# EAGLE board Lilypad_Arduino_USB-Panel-v12b (EAGLE 9.6.2)
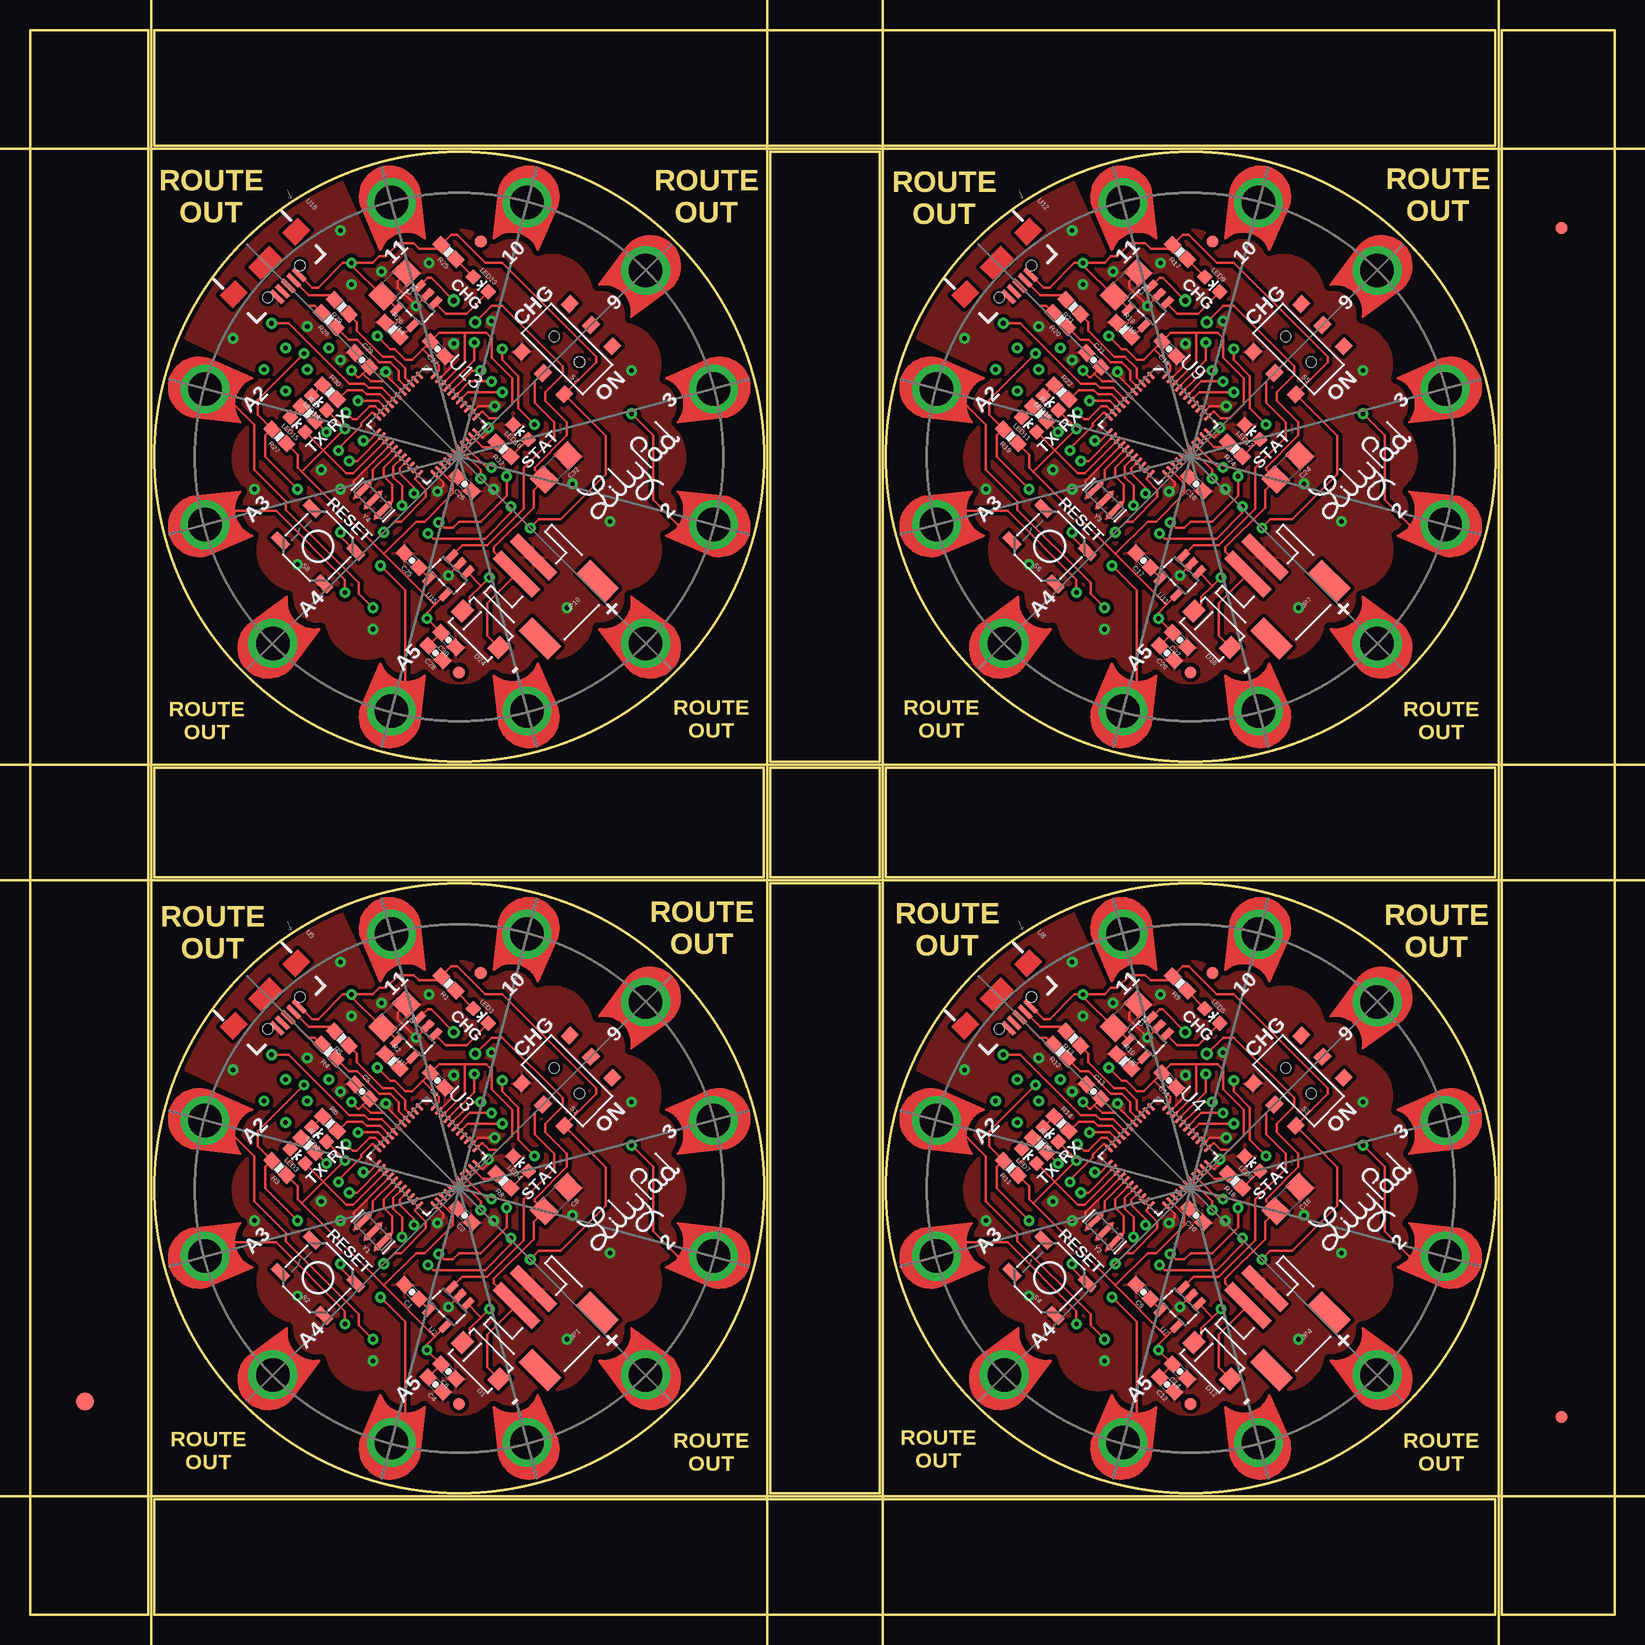
[diagram p0: board, top side]
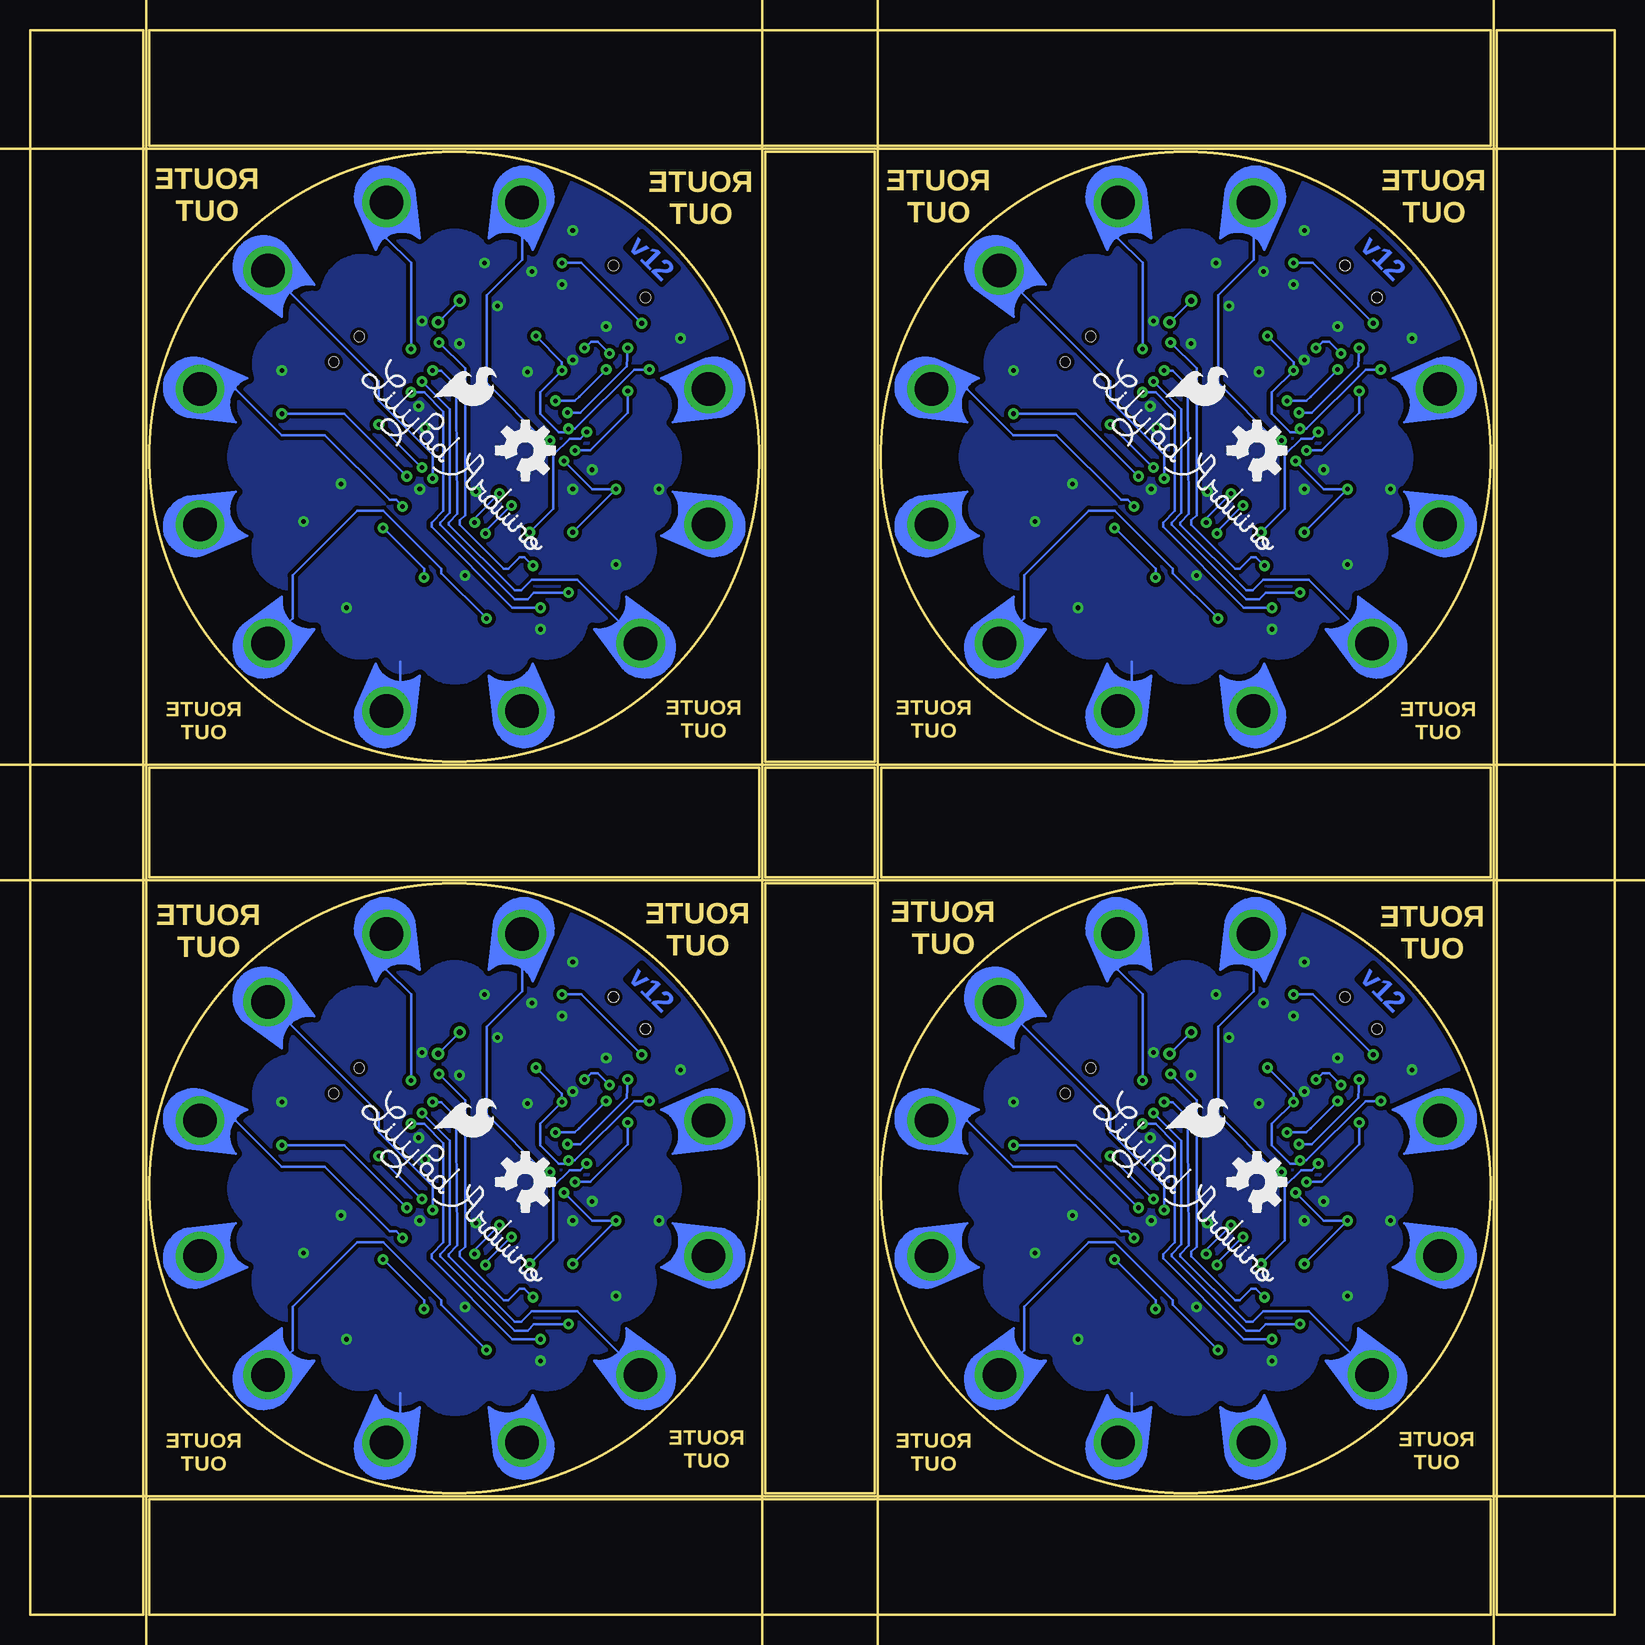
[diagram p1: board, bottom side, seen from below]

Size 132.08 x 132.08 mm. Coordinates in mm from the lower left corner, seen from the top.
Outline: 9.86,0 9.86,132.08 0,132.08 0,0 9.86,0
Outline: 10.36,0 122.12,0 122.12,9.65 10.36,9.65 10.36,0
Outline: 132.08,0 132.08,132.08 122.63,132.08 122.63,0 132.08,0
Outline: 122.12,132.08 10.36,132.08 10.36,122.43 122.12,122.43 122.12,132.08
Outline: 10.36,70.61 10.36,61.47 61.16,61.47 61.16,70.61 10.36,70.61
Outline: 71.32,70.61 71.32,61.47 122.12,61.47 122.12,70.61 71.32,70.61
Outline: 61.67,71.12 70.81,71.12 70.81,121.92 61.67,121.92 61.67,71.12
Outline: 61.67,10.16 70.81,10.16 70.81,60.96 61.67,60.96 61.67,10.16
Outline: 61.67,70.61 61.67,61.47 70.81,61.47 70.81,70.61 61.67,70.61
Outline: circle at 35.77,35.55 radius 25.4
Outline: circle at 96.73,35.55 radius 25.4
Outline: circle at 96.73,96.51 radius 25.4
Outline: circle at 35.77,96.51 radius 25.4
Copper layers (1*16): Top 0.035mm / dielectric 1.5mm / Bottom 0.035mm
Design rules "SparkFun-2-layer": minimum track width 7mil, minimum drill 15mil, track to track 8mil, track to pad 8mil, pad to pad 8mil, via to via 8mil, smd to smd 8mil, copper to edge 8mil, drill to drill 8mil, minimum pad ring 12mil, minimum via ring 10mil, stop-mask expansion 4mil, vias tented up to drill 20mil, thermal gap 10mil
tRestrict: area 10.7,26.1 to 18.6,32.7; area 52.9,38.4 to 60.9,45; area 15.7,15.6 to 24.2,24; area 47.4,47.1 to 55.8,55.5; area 52.9,26 to 60.9,32.6; area 38.7,52.7 to 45.4,60.6; area 26.2,10.5 to 32.9,18.4; area 10.7,38.5 to 18.6,45.1; area 26.3,52.7 to 32.9,60.6; area 38.6,10.5 to 45.2,18.4; area 12.3,20 to 21.5,29; area 10.3,32 to 17.6,39; 84 more areas
bRestrict: area 15.7,15.6 to 24.2,24; area 47.4,47.1 to 55.8,55.5; area 52.9,26 to 60.9,32.6; area 38.7,52.7 to 45.4,60.6; area 26.2,10.5 to 32.9,18.4; area 10.7,38.5 to 18.6,45.1; area 26.3,52.7 to 32.9,60.6; area 38.6,10.5 to 45.2,18.4; area 12.3,20 to 21.5,29; area 10.3,32 to 17.6,39; area 42.3,49.8 to 51.3,59; area 32.3,53.7 to 39.3,61; 72 more areas
Milling: 8 lines

## Footprints (pad centres in the part's own frame; a part is rotated, then mirrored left to right if it is on the bottom)
PETAL-LONG-1-2SIDE = drill 2.794 pad 4.064: 1 0.03,0
0603-CAP = smd 1.1 x 1: 1 -0.85,0; 2 0.85,0
1206 = smd 1.6 x 1.8: 1 -1.4,0; 2 1.4,0
SMA-DIODE = smd 1.27 x 1.47: A -2.15,0; C 2.15,0
FIDUCIAL-1.5X3 = smd 1.5 x 1.5: 1 0,0
FIDUCIAL-1X2 = smd 1 x 1: 1 0,0
JST-2-SMD = smd 1 x 4.6: 1 -1,-3.7; 2 1,-3.7 | smd 1.6 x 3.4: NC1 -3.4,1.5; NC2 3.4,1.5
LED-0603 = smd 1 x 1: A 0,-0.877; C 0,0.877
0603-RES = smd 1.1 x 1: 1 -0.85,0; 2 0.85,0
AYZ0202 = smd 1 x 1.15: 1 -2.5,2.825; 2 0,2.825; 3 2.5,2.825; 4 -2.5,-2.825; 5 0,-2.825; 6 2.5,-2.825 | hole 0.85: 1.5,0; -1.5,0
TACTILE_SWITCH_SMD = smd 1.524 x 0.762: 1 -2.54,1.905; 2 2.54,1.905; 3 -2.54,-1.905; 4 2.54,-1.905
SOT23-5 = smd 0.55 x 1.2: 1 -0.95,-1.3; 2 0,-1.3; 3 0.95,-1.3; 4 0.95,1.3; 5 -0.95,1.3
QFN-44-NOPAD_1:1-LESS_PASTE = smd 0.8 x 0.3: 1 -3.337,2.458; 2 -3.337,1.958; 3 -3.337,1.479; 4 -3.337,0.979; 5 -3.337,0.5; 6 -3.337,0; 7 -3.337,-0.5; 8 -3.337,-0.979; 9 -3.337,-1.479; 10 -3.337,-1.958; 11 -3.337,-2.458; 23 3.337,-2.458; 24 3.337,-1.958; 25 3.337,-1.479; 26 3.337,-0.979; 27 3.337,-0.5; 28 3.337,0; 29 3.337,0.5; 30 3.337,0.979; 31 3.337,1.479; 32 3.337,1.958; 33 3.337,2.458 | smd 0.3 x 0.8: 12 -2.458,-3.337; 13 -1.958,-3.337; 14 -1.479,-3.337; 15 -0.979,-3.337; 16 -0.5,-3.337; 17 0,-3.337; 18 0.5,-3.337; 19 0.979,-3.337; 20 1.479,-3.337; 21 1.958,-3.337; 22 2.458,-3.337; 34 2.458,3.337; 35 1.958,3.337; 36 1.479,3.337; 37 0.979,3.337; 38 0.5,3.337; 39 0,3.337; 40 -0.5,3.337; 41 -0.979,3.337; 42 -1.479,3.337; 43 -1.958,3.337; 44 -2.458,3.337
USB-AB-MICRO-SMD_V03 = smd 1.4 x 0.4: D+1 2.7,0; D-1 2.7,0.65; GND1 2.7,-1.3; ID1 2.7,-0.65; VBUS1 2.7,1.3 | hole 0.85: 2.2,1.9; 2.2,-1.9
RESONATOR-SMD = smd 0.45 x 1.905: 1 -1.2,0; 2 0,0; 3 1.2,0

## Placement (x,y rotation side)
+  SEWTAP9  [PETAL-LONG-1-2SIDE]  51.32,19.99 135 top
+1  SEWTAP9  [PETAL-LONG-1-2SIDE]  112.28,19.99 135 top
+2  SEWTAP9  [PETAL-LONG-1-2SIDE]  112.28,80.95 135 top
+3  SEWTAP9  [PETAL-LONG-1-2SIDE]  51.32,80.95 135 top
-  SEWTAP9  [PETAL-LONG-1-2SIDE]  41.42,14.34 105 top
-1  SEWTAP9  [PETAL-LONG-1-2SIDE]  102.38,14.34 105 top
-2  SEWTAP9  [PETAL-LONG-1-2SIDE]  102.38,75.3 105 top
-3  SEWTAP9  [PETAL-LONG-1-2SIDE]  41.42,75.3 105 top
A1  SEWTAP9  [PETAL-LONG-1-2SIDE]  75.51,41.21 345 top
A2  SEWTAP9  [PETAL-LONG-1-2SIDE]  14.55,41.21 345 top
A3  SEWTAP9  [PETAL-LONG-1-2SIDE]  14.55,29.89 15 top
A4  SEWTAP9  [PETAL-LONG-1-2SIDE]  20.21,19.99 45 top
A5  SEWTAP9  [PETAL-LONG-1-2SIDE]  30.11,14.34 75 top
A6  SEWTAP9  [PETAL-LONG-1-2SIDE]  75.51,29.89 15 top
A7  SEWTAP9  [PETAL-LONG-1-2SIDE]  91.07,14.34 75 top
A8  SEWTAP9  [PETAL-LONG-1-2SIDE]  81.17,19.99 45 top
A9  SEWTAP9  [PETAL-LONG-1-2SIDE]  75.51,102.17 345 top
A10  SEWTAP9  [PETAL-LONG-1-2SIDE]  75.51,90.85 15 top
A11  SEWTAP9  [PETAL-LONG-1-2SIDE]  91.07,75.3 75 top
A12  SEWTAP9  [PETAL-LONG-1-2SIDE]  81.17,80.95 45 top
A13  SEWTAP9  [PETAL-LONG-1-2SIDE]  14.55,102.17 345 top
A14  SEWTAP9  [PETAL-LONG-1-2SIDE]  14.55,90.85 15 top
A15  SEWTAP9  [PETAL-LONG-1-2SIDE]  30.11,75.3 75 top
A16  SEWTAP9  [PETAL-LONG-1-2SIDE]  20.21,80.95 45 top
C1  470pF  [0603-CAP]  31.82,26.93 135 top
C2  .1uF  [0603-CAP]  36.22,33.3 135 top
C3  .1uF  [0603-CAP]  33.97,44.53 135 top
C4  .1uF  [0603-CAP]  33.79,19.2 135 top
C5  1uF  [0603-CAP]  27.68,43.63 315 top
C6  4.7uF  [0603-CAP]  34.87,20.28 135 top
C7  4.7uF  [1206]  30.38,49.92 225 top
C8  4.7uF  [1206]  43.85,34.65 225 top
C9  470pF  [0603-CAP]  92.78,26.93 135 top
C10  .1uF  [0603-CAP]  97.18,33.3 135 top
C11  .1uF  [0603-CAP]  94.93,44.53 135 top
C12  .1uF  [0603-CAP]  94.75,19.2 135 top
C13  1uF  [0603-CAP]  88.64,43.63 315 top
C14  4.7uF  [0603-CAP]  95.83,20.28 135 top
C15  4.7uF  [1206]  91.34,49.92 225 top
C16  4.7uF  [1206]  104.81,34.65 225 top
C17  470pF  [0603-CAP]  92.78,87.89 135 top
C18  .1uF  [0603-CAP]  97.18,94.26 135 top
C19  .1uF  [0603-CAP]  94.93,105.49 135 top
C20  .1uF  [0603-CAP]  94.75,80.16 135 top
C21  1uF  [0603-CAP]  88.64,104.59 315 top
C22  4.7uF  [0603-CAP]  95.83,81.24 135 top
C23  4.7uF  [1206]  91.34,110.88 225 top
C24  4.7uF  [1206]  104.81,95.61 225 top
C25  470pF  [0603-CAP]  31.82,87.89 135 top
C26  .1uF  [0603-CAP]  36.22,94.26 135 top
C27  .1uF  [0603-CAP]  33.97,105.49 135 top
C28  .1uF  [0603-CAP]  33.79,80.16 135 top
C29  1uF  [0603-CAP]  27.68,104.59 315 top
C30  4.7uF  [0603-CAP]  34.87,81.24 135 top
C31  4.7uF  [1206]  30.38,110.88 225 top
C32  4.7uF  [1206]  43.85,95.61 225 top
D1  B340A  [SMA-DIODE]  37.56,21.18 135 top
D2  SEWTAP9  [PETAL-LONG-1-2SIDE]  117.94,29.89 165 top
D3  SEWTAP9  [PETAL-LONG-1-2SIDE]  112.28,51.11 225 top
D4  SEWTAP9  [PETAL-LONG-1-2SIDE]  117.94,41.21 195 top
D5  SEWTAP9  [PETAL-LONG-1-2SIDE]  56.98,29.89 165 top
D6  SEWTAP9  [PETAL-LONG-1-2SIDE]  56.98,41.21 195 top
D7  SEWTAP9  [PETAL-LONG-1-2SIDE]  102.38,56.76 255 top
D8  SEWTAP9  [PETAL-LONG-1-2SIDE]  91.07,56.76 285 top
D9  SEWTAP9  [PETAL-LONG-1-2SIDE]  51.32,51.11 225 top
D10  SEWTAP9  [PETAL-LONG-1-2SIDE]  41.42,56.76 255 top
D11  SEWTAP9  [PETAL-LONG-1-2SIDE]  30.11,56.76 285 top
D12  B340A  [SMA-DIODE]  98.52,21.18 135 top
D13  SEWTAP9  [PETAL-LONG-1-2SIDE]  117.94,90.85 165 top
D14  SEWTAP9  [PETAL-LONG-1-2SIDE]  112.28,112.07 225 top
D15  SEWTAP9  [PETAL-LONG-1-2SIDE]  117.94,102.17 195 top
D16  SEWTAP9  [PETAL-LONG-1-2SIDE]  102.38,117.72 255 top
D17  SEWTAP9  [PETAL-LONG-1-2SIDE]  91.07,117.72 285 top
D18  B340A  [SMA-DIODE]  98.52,82.14 135 top
D19  SEWTAP9  [PETAL-LONG-1-2SIDE]  56.98,90.85 165 top
D20  SEWTAP9  [PETAL-LONG-1-2SIDE]  51.32,112.07 225 top
D21  SEWTAP9  [PETAL-LONG-1-2SIDE]  56.98,102.17 195 top
D22  SEWTAP9  [PETAL-LONG-1-2SIDE]  41.42,117.72 255 top
D23  SEWTAP9  [PETAL-LONG-1-2SIDE]  30.11,117.72 285 top
D24  B340A  [SMA-DIODE]  37.56,82.14 135 top
E$1  [FIDUCIAL-1.5X3]  4.57,17.78 0 top
E$3  [FIDUCIAL-1X2]  127.64,16.51 0 top
E$5  [FIDUCIAL-1X2]  127.64,115.57 180 top
JP1  JST-2  [JST-2-SMD]  43.85,23.87 225 top
JP2  FIDUCIAL1X2  [FIDUCIAL-1X2]  35.77,17.59 45 top
JP3  FIDUCIAL1X2  [FIDUCIAL-1X2]  37.56,53.51 45 top
JP4  JST-2  [JST-2-SMD]  104.81,23.87 225 top
JP5  FIDUCIAL1X2  [FIDUCIAL-1X2]  96.73,17.59 45 top
JP6  FIDUCIAL1X2  [FIDUCIAL-1X2]  98.52,53.51 45 top
JP7  JST-2  [JST-2-SMD]  104.81,84.83 225 top
JP8  FIDUCIAL1X2  [FIDUCIAL-1X2]  96.73,78.55 45 top
JP9  FIDUCIAL1X2  [FIDUCIAL-1X2]  98.52,114.47 45 top
JP10  JST-2  [JST-2-SMD]  43.85,84.83 225 top
JP11  FIDUCIAL1X2  [FIDUCIAL-1X2]  35.77,78.55 45 top
JP12  FIDUCIAL1X2  [FIDUCIAL-1X2]  37.56,114.47 45 top
LED1  RED  [LED-0603]  37.56,49.92 225 top
LED2  RED  [LED-0603]  24.09,40.04 45 top
LED3  RED  [LED-0603]  22.3,38.24 45 top
LED4  RED  [LED-0603]  40.89,37.61 45 top
LED5  RED  [LED-0603]  98.52,49.92 225 top
LED6  RED  [LED-0603]  85.05,40.04 45 top
LED7  RED  [LED-0603]  83.26,38.24 45 top
LED8  RED  [LED-0603]  101.85,37.61 45 top
LED9  RED  [LED-0603]  98.52,110.88 225 top
LED10  RED  [LED-0603]  85.05,101 45 top
LED11  RED  [LED-0603]  83.26,99.2 45 top
LED12  RED  [LED-0603]  101.85,98.57 45 top
LED13  RED  [LED-0603]  37.56,110.88 225 top
LED14  RED  [LED-0603]  24.09,101 45 top
LED15  RED  [LED-0603]  22.3,99.2 45 top
LED16  RED  [LED-0603]  40.89,98.57 45 top
R1  330  [0603-RES]  34.87,52.61 135 top
R2  10k  [0603-RES]  30.2,46.15 315 top
R3  10k  [0603-RES]  20.77,37.26 135 top
R4  22  [0603-RES]  24.9,46.95 135 top
R5  22  [0603-RES]  25.98,48.03 135 top
R6  330  [0603-RES]  24.99,40.94 315 top
R7  330  [0603-RES]  23.19,39.14 315 top
R8  330  [0603-RES]  39.45,36.18 135 top
R9  330  [0603-RES]  95.83,52.61 135 top
R10  10k  [0603-RES]  91.16,46.15 315 top
R11  10k  [0603-RES]  81.73,37.26 135 top
R12  22  [0603-RES]  85.86,46.95 135 top
R13  22  [0603-RES]  86.94,48.03 135 top
R14  330  [0603-RES]  85.95,40.94 315 top
R15  330  [0603-RES]  84.15,39.14 315 top
R16  330  [0603-RES]  100.41,36.18 135 top
R17  330  [0603-RES]  95.83,113.57 135 top
R18  10k  [0603-RES]  91.16,107.11 315 top
R19  10k  [0603-RES]  81.73,98.22 135 top
R20  22  [0603-RES]  85.86,107.91 135 top
R21  22  [0603-RES]  86.94,108.99 135 top
R22  330  [0603-RES]  85.95,101.9 315 top
R23  330  [0603-RES]  84.15,100.1 315 top
R24  330  [0603-RES]  100.41,97.14 135 top
R25  330  [0603-RES]  34.87,113.57 135 top
R26  10k  [0603-RES]  30.2,107.11 315 top
R27  10k  [0603-RES]  20.77,98.22 135 top
R28  22  [0603-RES]  24.9,107.91 135 top
R29  22  [0603-RES]  25.98,108.99 135 top
R30  330  [0603-RES]  24.99,101.9 315 top
R31  330  [0603-RES]  23.19,100.1 315 top
R32  330  [0603-RES]  39.45,97.14 135 top
S1  [AYZ0202]  44.75,44.53 135 top
S2  !RESET  [TACTILE_SWITCH_SMD]  24,28.1 135 top
S3  [AYZ0202]  105.71,44.53 135 top
S4  !RESET  [TACTILE_SWITCH_SMD]  84.96,28.1 135 top
S5  [AYZ0202]  105.71,105.49 135 top
S6  !RESET  [TACTILE_SWITCH_SMD]  84.96,89.06 135 top
S7  [AYZ0202]  44.75,105.49 135 top
S8  !RESET  [TACTILE_SWITCH_SMD]  24,89.06 135 top
U1  MCP73831  [SOT23-5]  32.17,48.12 135 top
U2  MIC5219  [SOT23-5]  34.87,25.67 135 top
U3  ATMEGA32U41:1-LESS_PASTE  [QFN-44-NOPAD_1:1-LESS_PASTE]  33.07,38.24 315 top
U4  ATMEGA32U41:1-LESS_PASTE  [QFN-44-NOPAD_1:1-LESS_PASTE]  94.03,38.24 315 top
U5  [USB-AB-MICRO-SMD_V03]  19.6,51.71 315 top
U6  MCP73831  [SOT23-5]  93.13,48.12 135 top
U7  MIC5219  [SOT23-5]  95.83,25.67 135 top
U8  [USB-AB-MICRO-SMD_V03]  80.56,51.71 315 top
U9  ATMEGA32U41:1-LESS_PASTE  [QFN-44-NOPAD_1:1-LESS_PASTE]  94.03,99.2 315 top
U10  MCP73831  [SOT23-5]  93.13,109.08 135 top
U11  MIC5219  [SOT23-5]  95.83,86.63 135 top
U12  [USB-AB-MICRO-SMD_V03]  80.56,112.67 315 top
U13  ATMEGA32U41:1-LESS_PASTE  [QFN-44-NOPAD_1:1-LESS_PASTE]  33.07,99.2 315 top
U14  MCP73831  [SOT23-5]  32.17,109.08 135 top
U15  MIC5219  [SOT23-5]  34.87,86.63 135 top
U16  [USB-AB-MICRO-SMD_V03]  19.6,112.67 315 top
U$1  LOGO-LPLPA  [LOGO-LPA]  35.77,35.55 315 bottom
U$2  LOGO-LPLP  [LOGO-LILYPAD]  111.01,34.38 45 top
U$3  LOGO-LPLPA  [LOGO-LPA]  96.73,35.55 315 bottom
U$4  OSHW-LOGOM  [OSHW-LOGO-M]  90.8,36.09 315 bottom
U$5  OSHW-LOGOM  [OSHW-LOGO-M]  29.84,36.09 315 bottom
U$6  [SFE_LOGO_FLAME_.2]  98.88,40.58 315 bottom
U$7  [SFE_LOGO_FLAME_.2]  37.92,40.58 315 bottom
U$8  LOGO-LPLP  [LOGO-LILYPAD]  111.01,95.34 45 top
U$9  LOGO-LPLPA  [LOGO-LPA]  96.73,96.51 315 bottom
U$10  OSHW-LOGOM  [OSHW-LOGO-M]  90.8,97.05 315 bottom
U$11  [SFE_LOGO_FLAME_.2]  98.88,101.54 315 bottom
U$12  LOGO-LPLP  [LOGO-LILYPAD]  50.05,95.34 45 top
U$13  LOGO-LPLP  [LOGO-LILYPAD]  50.05,34.38 45 top
U$14  LOGO-LPLPA  [LOGO-LPA]  35.77,96.51 315 bottom
U$15  OSHW-LOGOM  [OSHW-LOGO-M]  29.84,97.05 315 bottom
U$16  [SFE_LOGO_FLAME_.2]  37.92,101.54 315 bottom
Y1  8MHz  [RESONATOR-SMD]  28.58,31.96 135 top
Y2  8MHz  [RESONATOR-SMD]  89.54,31.96 135 top
Y3  8MHz  [RESONATOR-SMD]  89.54,92.92 135 top
Y4  8MHz  [RESONATOR-SMD]  28.58,92.92 135 top

## Library data of the parts
+ +1-+3 - -1--3 A1-A16 D2-D11 D13-D17 D19-D23 U$2 U$8 U$12 U$13 = LilyPad-Wearables; NO_PART: 1
C1 C9 C17 C25 = SparkFun-Passives; PROD_ID: CAP-07884
C2-C4 C10-C12 C18-C20 C26-C28 = SparkFun-Passives; PROD_ID: CAP-00810
C5 C13 C21 C29 = SparkFun-Passives; PROD_ID: CAP-00868
C6 C14 C22 C30 = SparkFun-Passives; PROD_ID: CAP-08280
C7 C8 C15 C16 C23 C24 C31 C32 = SparkFun-Passives; PROD_ID: CAP-10300
D1 D12 D18 D24 = SparkFun-DiscreteSemi; PROD_ID: DIO-09886
E$1 = SparkFun-Retired
E$3 E$5 U$6 U$7 U$11 U$16 = SparkFun-Aesthetics
JP1 JP4 JP7 JP10 = SparkFun-Connectors; PROD_ID: CONN-08352
JP2 JP3 JP5 JP6 JP8 JP9 JP11 JP12 U$4 U$5 U$10 U$15 = SparkFun
LED1-LED16 = SparkFun-LED; PROD_ID: DIO-00819
R1 R7-R9 R15-R17 R23-R25 R31 R32 = SparkFun-Passives; PROD_ID: RES-00818
R2 R3 R10 R11 R18 R19 R26 R27 = SparkFun-Resistors; PROD_ID: RES-00824
R4 R5 R12 R13 R20 R21 R28 R29 = SparkFun-Resistors; PROD_ID: RES-08698
R6 R14 R22 R30 = SparkFun-Resistors; PROD_ID: RES-00818
S1 S3 S5 S7 = SparkFun-Electromechanical; PROD_ID: SWCH-08179; VALUE: DPDT
S2 S4 S6 S8 = SparkFun-Electromechanical; PROD_ID: SWCH-08247
U1 U6 U10 U14 = SparkFun-PowerIC; PROD_ID: IC-09995
U2 U7 U11 U15 = SparkFun-PowerIC; PROD_ID: VREG-09872; VALUE: MIC5219 3.3V
U3 U4 U9 U13 = Testing; PROD_ID: IC-10828
U5 U8 U12 U16 = SparkFun-Connectors; PROD_ID: CONN-11794
U$1 U$3 U$9 U$14 = LilyPad-Wearables
Y1-Y4 = SparkFun-FreqCtrl; PROD_ID: XTAL-08895; VALUE: 8MHZ

## Nets
3.3V: +.1 C2.2 C3.2 C4.2 C5.2 C6.2 LED2.A LED3.A R3.1 U2.5 U3.6 U3.14 U3.24 U3.34 U3.42 U3.44
3.3V1: +1.1 C10.2 C11.2 C12.2 C13.2 C14.2 LED6.A LED7.A R11.1 U4.6 U4.14 U4.24 U4.34 U4.42 U4.44 U7.5
3.3V2: +2.1 C18.2 C19.2 C20.2 C21.2 C22.2 LED10.A LED11.A R19.1 U9.6 U9.14 U9.24 U9.34 U9.42 U9.44 U11.5
3.3V3: +3.1 C26.2 C27.2 C28.2 C29.2 C30.2 LED14.A LED15.A R27.1 U13.6 U13.14 U13.24 U13.34 U13.42 U13.44 U15.5
5V: C7.2 D1.C R1.2 S1.1 U1.4 U2.1 U3.7 U5.VBUS1
5V1: C15.2 D12.C R9.2 S3.1 U4.7 U6.4 U7.1 U8.VBUS1
5V2: C23.2 D18.C R17.2 S5.1 U9.7 U10.4 U11.1 U12.VBUS1
5V3: C31.2 D24.C R25.2 S7.1 U13.7 U14.4 U15.1 U16.VBUS1
D+: R4.1 U3.4
D+1: R12.1 U4.4
D+2: R20.1 U9.4
D+3: R28.1 U13.4
D-: R5.1 U3.3
D-1: R13.1 U4.3
D-2: R21.1 U9.3
D-3: R29.1 U13.3
GND: -.1 C1.2 C2.1 C3.1 C4.1 C5.1 C6.1 C7.1 C8.1 JP1.1 LED4.C R2.1 S1.3 S2.1 U1.2 U2.2 U3.5 U3.15 U3.23 U3.33 U3.35 U3.43 U5.GND1 Y1.2
GND1: -1.1 C9.2 C10.1 C11.1 C12.1 C13.1 C14.1 C15.1 C16.1 JP4.1 LED8.C R10.1 S3.3 S4.1 U4.5 U4.15 U4.23 U4.33 U4.35 U4.43 U6.2 U7.2 U8.GND1 Y2.2
GND2: -2.1 C17.2 C18.1 C19.1 C20.1 C21.1 C22.1 C23.1 C24.1 JP7.1 LED12.C R18.1 S5.3 S6.1 U9.5 U9.15 U9.23 U9.33 U9.35 U9.43 U10.2 U11.2 U12.GND1 Y3.2
GND3: -3.1 C25.2 C26.1 C27.1 C28.1 C29.1 C30.1 C31.1 C32.1 JP10.1 LED16.C R26.1 S7.3 S8.1 U13.5 U13.15 U13.23 U13.33 U13.35 U13.43 U14.2 U15.2 U16.GND1 Y4.2
MISO: U3.11
MISO1: U4.11
MISO2: U9.11
MISO3: U13.11
MOSI: U3.10
MOSI1: U4.10
MOSI2: U9.10
MOSI3: U13.10
N$1: LED2.C R6.1
N$2: S1.2 U2.3
N$3: LED1.A R1.1
N$4: LED1.C U1.1
N$5: U3.17 Y1.1
N$6: R2.2 U1.5
N$7: U3.16 Y1.3
N$8: C1.1 U2.4
N$9: D11.1 U3.12
N$10: D10.1 U3.30
N$11: D9.1 U3.29
N$12: D5.1 U3.19
N$13: D6.1 U3.18
N$14: A5.1 U3.41
N$15: A4.1 U3.40
N$16: A3.1 U3.39
N$17: A2.1 U3.38
N$18: LED4.A R8.1
N$19: R5.2 U5.D-1
N$20: R4.2 U5.D+1
N$21: LED3.C R7.1
N$22: S3.2 U7.3
N$23: LED5.A R9.1
N$24: LED5.C U6.1
N$25: R10.2 U6.5
N$26: C9.1 U7.4
N$27: D8.1 U4.12
N$28: D7.1 U4.30
N$29: D3.1 U4.29
N$30: A7.1 U4.41
N$31: A8.1 U4.40
N$32: A6.1 U4.39
N$33: A1.1 U4.38
N$34: R13.2 U8.D-1
N$35: R12.2 U8.D+1
N$36: LED6.C R14.1
N$37: LED7.C R15.1
N$38: U4.17 Y2.1
N$39: U4.16 Y2.3
N$40: D2.1 U4.19
N$41: D4.1 U4.18
N$42: LED8.A R16.1
N$43: S5.2 U11.3
N$44: LED9.A R17.1
N$45: LED9.C U10.1
N$46: R18.2 U10.5
N$47: C17.1 U11.4
N$48: D17.1 U9.12
N$49: D16.1 U9.30
N$50: D14.1 U9.29
N$51: A11.1 U9.41
N$52: A12.1 U9.40
N$53: A10.1 U9.39
N$54: A9.1 U9.38
N$55: R21.2 U12.D-1
N$56: R20.2 U12.D+1
N$57: LED10.C R22.1
N$58: LED11.C R23.1
N$59: U9.17 Y3.1
N$60: U9.16 Y3.3
N$61: D13.1 U9.19
N$62: D15.1 U9.18
N$63: LED12.A R24.1
N$64: S7.2 U15.3
N$65: LED13.A R25.1
N$66: LED13.C U14.1
N$67: R26.2 U14.5
N$68: C25.1 U15.4
N$69: D23.1 U13.12
N$70: D22.1 U13.30
N$71: D20.1 U13.29
N$72: A15.1 U13.41
N$73: A16.1 U13.40
N$74: A14.1 U13.39
N$75: A13.1 U13.38
N$76: R29.2 U16.D-1
N$77: R28.2 U16.D+1
N$78: LED14.C R30.1
N$79: LED15.C R31.1
N$80: U13.17 Y4.1
N$81: U13.16 Y4.3
N$82: D19.1 U13.19
N$83: D21.1 U13.18
N$84: LED16.A R32.1
RESET: R3.2 S2.3 U3.13
RESET1: R11.2 S4.3 U4.13
RESET2: R19.2 S6.3 U9.13
RESET3: R27.2 S8.3 U13.13
RX_LED: R6.2 U3.8
RX_LED1: R14.2 U4.8
RX_LED2: R22.2 U9.8
RX_LED3: R30.2 U13.8
SCK: U3.9
SCK1: U4.9
SCK2: U9.9
SCK3: U13.9
TX_LED: R7.2 U3.22
TX_LED1: R15.2 U4.22
TX_LED2: R23.2 U9.22
TX_LED3: R31.2 U13.22
USER_LED: R8.2 U3.32
USER_LED1: R16.2 U4.32
USER_LED2: R24.2 U9.32
USER_LED3: R32.2 U13.32
V_BATT: C8.2 D1.A JP1.2 U1.3
V_BATT1: C16.2 D12.A JP4.2 U6.3
V_BATT2: C24.2 D18.A JP7.2 U10.3
V_BATT3: C32.2 D24.A JP10.2 U14.3

## Tracks (layer width: path | path; a pad name or v marks a point on that pad's centre or on a via)
3.3V  (via drill 0.38)
  Top 0.203: 34.42,23.88 U2.5 33.79,23.25 | LED2.A 25.8,38.33 v26.25,37.88 24.45,36.09 | 33.79,23.25 33.7,23.25 29.48,27.47 | 33.79,23.25 33.07,22.53 v33.07,22.08 C6.2 C4.2 | R3.1 22.3,35.73 22.3,34.65 22.66,34.29 | 32.74,44.5 C3.2 34.12,45.88 36.22,45.88 | U3.44 34.06,42.71 34.06,43.18 32.74,44.5 | 29.48,27.47 32.17,30.16 32.89,30.16 35.23,32.5 35.23,33.32 35.13,33.42 | U3.24 35.13,33.42 | C2.2 35.13,33.42 | 27.75,42.49 27.45,42.19 27.33,42.19 v26.79,42.73 | U3.6 29.48,41.84 28.4,41.84 27.75,42.49 | 27.75,42.49 C5.2 | v28.94,45.61 30.02,44.53 30.38,44.53 31.28,43.63 31.87,43.63 32.74,44.5 | U3.34 37.63,39.32 37.74,39.32 38.28,38.78 39,38.78 40.17,39.95 40.17,42.1 38.46,43.81 38.46,45.43 38.01,45.88 36.22,45.88 | U3.42 36.22,43.48 36.22,45.88 | U3.14 26.94,34.2 26.34,34.2 24.45,36.09 | 22.66,34.29 24.45,36.09 | 24.45,36.09 | 24.45,36.09 | LED3.A 24.45,36.09 | 24.45,36.09 | 22.66,34.29 | 22.66,34.29 29.48,27.47
  Bottom 0.203: v19.51,42.82 20.77,42.82 25.71,37.88 v26.25,37.88 | v33.07,22.08 36.84,25.85 36.84,26.21 41.69,31.06 43.85,31.06 49.24,25.67 49.24,22.08 +.1 | v26.25,37.88 | v26.25,37.88 26.52,37.62 27.06,37.62 28.58,39.14 28.58,40.94 v26.79,42.73 26.79,43.45 v28.94,45.61
3.3V1  (via drill 0.38)
  Top 0.203: 95.38,23.88 U7.5 94.75,23.25 | LED6.A 86.76,38.33 v87.21,37.88 85.41,36.09 | 94.75,23.25 94.66,23.25 90.44,27.47 | 94.75,23.25 94.03,22.53 v94.03,22.08 C14.2 C12.2 | R11.1 83.26,35.73 83.26,34.65 83.62,34.29 | 93.7,44.5 C11.2 95.08,45.88 97.18,45.88 | U4.44 95.02,42.71 95.02,43.18 93.7,44.5 | 90.44,27.47 93.14,30.16 93.85,30.16 96.19,32.5 96.19,33.32 96.09,33.42 | U4.24 96.09,33.42 | C10.2 96.09,33.42 | 88.71,42.49 88.41,42.19 88.29,42.19 v87.75,42.73 | U4.6 90.44,41.84 89.36,41.84 88.71,42.49 | 88.71,42.49 C13.2 | v89.9,45.61 90.98,44.53 91.34,44.53 92.24,43.63 92.83,43.63 93.7,44.5 | U4.34 98.59,39.32 98.7,39.32 99.24,38.78 99.96,38.78 101.13,39.95 101.13,42.1 99.42,43.81 99.42,45.43 98.97,45.88 97.18,45.88 | U4.42 97.18,43.48 97.18,45.88 | U4.14 87.9,34.2 87.3,34.2 85.41,36.09 | 83.62,34.29 85.41,36.09 | 85.41,36.09 | 85.41,36.09 | LED7.A 85.41,36.09 | 85.41,36.09 | 83.62,34.29 | 83.62,34.29 90.44,27.47
  Bottom 0.203: v80.47,42.82 81.73,42.82 86.67,37.88 v87.21,37.88 | v94.03,22.08 97.81,25.85 97.81,26.21 102.65,31.06 104.81,31.06 110.2,25.67 110.2,22.08 +1.1 | v87.21,37.88 | v87.21,37.88 87.48,37.62 88.02,37.62 89.54,39.14 89.54,40.94 v87.75,42.73 87.75,43.45 v89.9,45.61
3.3V2  (via drill 0.38)
  Top 0.203: 95.38,84.83 U11.5 94.75,84.21 | LED10.A 86.76,99.29 v87.21,98.84 85.41,97.05 | 94.75,84.21 94.66,84.21 90.44,88.43 | 94.75,84.21 94.03,83.49 v94.03,83.04 C22.2 C20.2 | R19.1 83.26,96.69 83.26,95.61 83.62,95.25 | 93.7,105.46 C19.2 95.08,106.84 97.18,106.84 | U9.44 95.02,103.67 95.02,104.14 93.7,105.46 | 90.44,88.43 93.14,91.12 93.85,91.12 96.19,93.46 96.19,94.28 96.09,94.38 | U9.24 96.09,94.38 | C18.2 96.09,94.38 | 88.71,103.45 88.41,103.15 88.29,103.15 v87.75,103.69 | U9.6 90.44,102.8 89.36,102.8 88.71,103.45 | 88.71,103.45 C21.2 | v89.9,106.57 90.98,105.49 91.34,105.49 92.24,104.59 92.83,104.59 93.7,105.46 | U9.34 98.59,100.28 98.7,100.28 99.24,99.74 99.96,99.74 101.13,100.91 101.13,103.06 99.42,104.77 99.42,106.39 98.97,106.84 97.18,106.84 | U9.42 97.18,104.44 97.18,106.84 | U9.14 87.9,95.16 87.3,95.16 85.41,97.05 | 83.62,95.25 85.41,97.05 | 85.41,97.05 | 85.41,97.05 | LED11.A 85.41,97.05 | 85.41,97.05 | 83.62,95.25 | 83.62,95.25 90.44,88.43
  Bottom 0.203: v80.47,103.78 81.73,103.78 86.67,98.84 v87.21,98.84 | v94.03,83.04 97.81,86.81 97.81,87.17 102.65,92.02 104.81,92.02 110.2,86.63 110.2,83.04 +2.1 | v87.21,98.84 | v87.21,98.84 87.48,98.58 88.02,98.58 89.54,100.1 89.54,101.9 v87.75,103.69 87.75,104.41 v89.9,106.57
3.3V3  (via drill 0.38)
  Top 0.203: 34.42,84.83 U15.5 33.79,84.21 | LED14.A 25.8,99.29 v26.25,98.84 24.45,97.05 | 33.79,84.21 33.7,84.21 29.48,88.43 | 33.79,84.21 33.07,83.49 v33.07,83.04 C30.2 C28.2 | R27.1 22.3,96.69 22.3,95.61 22.66,95.25 | 32.74,105.46 C27.2 34.12,106.84 36.22,106.84 | U13.44 34.06,103.67 34.06,104.14 32.74,105.46 | 29.48,88.43 32.17,91.12 32.89,91.12 35.23,93.46 35.23,94.28 35.13,94.38 | U13.24 35.13,94.38 | C26.2 35.13,94.38 | 27.75,103.45 27.45,103.15 27.33,103.15 v26.79,103.69 | U13.6 29.48,102.8 28.4,102.8 27.75,103.45 | 27.75,103.45 C29.2 | v28.94,106.57 30.02,105.49 30.38,105.49 31.28,104.59 31.87,104.59 32.74,105.46 | U13.34 37.63,100.28 37.74,100.28 38.28,99.74 39,99.74 40.17,100.91 40.17,103.06 38.46,104.77 38.46,106.39 38.01,106.84 36.22,106.84 | U13.42 36.22,104.44 36.22,106.84 | U13.14 26.94,95.16 26.34,95.16 24.45,97.05 | 22.66,95.25 24.45,97.05 | 24.45,97.05 | 24.45,97.05 | LED15.A 24.45,97.05 | 24.45,97.05 | 22.66,95.25 | 22.66,95.25 29.48,88.43
  Bottom 0.203: v19.51,103.78 20.77,103.78 25.71,98.84 v26.25,98.84 | v33.07,83.04 36.84,86.81 36.84,87.17 41.69,92.02 43.85,92.02 49.24,86.63 49.24,83.04 +3.1 | v26.25,98.84 | v26.25,98.84 26.52,98.58 27.06,98.58 28.58,100.1 28.58,101.9 v26.79,103.69 26.79,104.41 v28.94,106.57
5V  (via drill 0.38)
  Top 0.203: U3.7 29.31,41.3 28.22,41.3 27.86,41.66 26.61,41.66 21.58,46.69 v20.14,46.69 | v41.69,29.62 42.41,30.34 44.21,30.34 47.98,34.11 47.98,37.3 S1.1 47.17,43.42 47.17,43.9 39.36,51.71 37.92,51.71 35.59,54.05 35.1,54.05 R1.2 33.94,52.88 32.44,52.88 32,53.33 30.74,53.33 29.66,52.25 29.12,52.25 28.58,51.71 v26.79,51.71 | v26.79,51.71 26.07,51.71 24,49.65 23.51,49.65 U5.VBUS1 | v26.79,51.71 26.79,51.53 C7.2 29.53,48.93 U1.4 | 37.56,24.77 36.66,23.88 36.66,23.32 D1.C | 37.56,24.77 v38.28,25.49 | v38.28,25.49 | U2.1 37.56,24.82 37.56,24.77
  Bottom 0.203: v20.14,46.69 25.17,51.71 v26.79,51.71 | v41.69,29.62 38.28,26.21 v38.28,25.49
5V1  (via drill 0.38)
  Top 0.203: U4.7 90.27,41.3 89.18,41.3 88.82,41.66 87.57,41.66 82.54,46.69 v81.1,46.69 | v102.65,29.62 103.37,30.34 105.17,30.34 108.94,34.11 108.94,37.3 S3.1 108.13,43.42 108.13,43.9 100.32,51.71 98.88,51.71 96.55,54.05 96.06,54.05 R9.2 94.9,52.88 93.4,52.88 92.95,53.33 91.7,53.33 90.62,52.25 90.08,52.25 89.54,51.71 v87.75,51.71 | v87.75,51.71 87.03,51.71 84.96,49.65 84.47,49.65 U8.VBUS1 | v87.75,51.71 87.75,51.53 C15.2 90.49,48.93 U6.4 | 98.52,24.77 97.62,23.88 97.62,23.32 D12.C | 98.52,24.77 v99.24,25.49 | v99.24,25.49 | U7.1 98.52,24.82 98.52,24.77
  Bottom 0.203: v81.1,46.69 86.13,51.71 v87.75,51.71 | v102.65,29.62 99.24,26.21 v99.24,25.49
5V2  (via drill 0.38)
  Top 0.203: U9.7 90.27,102.26 89.18,102.26 88.82,102.62 87.57,102.62 82.54,107.64 v81.1,107.64 | v102.65,90.58 103.37,91.3 105.17,91.3 108.94,95.07 108.94,98.26 S5.1 108.13,104.38 108.13,104.86 100.32,112.67 98.88,112.67 96.55,115.01 96.06,115.01 R17.2 94.9,113.84 93.4,113.84 92.95,114.29 91.7,114.29 90.62,113.21 90.08,113.21 89.54,112.67 v87.75,112.67 | v87.75,112.67 87.03,112.67 84.96,110.61 84.47,110.61 U12.VBUS1 | v87.75,112.67 87.75,112.49 C23.2 90.49,109.89 U10.4 | 98.52,85.73 97.62,84.83 97.62,84.28 D18.C | 98.52,85.73 v99.24,86.45 | v99.24,86.45 | U11.1 98.52,85.78 98.52,85.73
  Bottom 0.203: v81.1,107.64 86.13,112.67 v87.75,112.67 | v102.65,90.58 99.24,87.17 v99.24,86.45
5V3  (via drill 0.38)
  Top 0.203: U13.7 29.31,102.26 28.22,102.26 27.86,102.62 26.61,102.62 21.58,107.64 v20.14,107.64 | v41.69,90.58 42.41,91.3 44.21,91.3 47.98,95.07 47.98,98.26 S7.1 47.17,104.38 47.17,104.86 39.36,112.67 37.92,112.67 35.59,115.01 35.1,115.01 R25.2 33.94,113.84 32.44,113.84 32,114.29 30.74,114.29 29.66,113.21 29.12,113.21 28.58,112.67 v26.79,112.67 | v26.79,112.67 26.07,112.67 24,110.61 23.51,110.61 U16.VBUS1 | v26.79,112.67 26.79,112.49 C31.2 29.53,109.89 U14.4 | 37.56,85.73 36.66,84.83 36.66,84.28 D24.C | 37.56,85.73 v38.28,86.45 | v38.28,86.45 | U15.1 37.56,85.78 37.56,85.73
  Bottom 0.203: v20.14,107.64 25.17,112.67 v26.79,112.67 | v41.69,90.58 38.28,87.17 v38.28,86.45
D+
  Top 0.203: R4.1 26.55,45.3 27.27,45.3 29.12,43.45 30.02,43.45 30.74,42.73 30.74,41.96 U3.4
D+1
  Top 0.203: R12.1 87.52,45.3 88.23,45.3 90.08,43.45 90.98,43.45 91.7,42.73 91.7,41.96 U4.4
D+2
  Top 0.203: R20.1 87.52,106.26 88.23,106.26 90.08,104.41 90.98,104.41 91.7,103.69 91.7,102.92 U9.4
D+3
  Top 0.203: R28.1 26.55,106.26 27.27,106.26 29.12,104.41 30.02,104.41 30.74,103.69 30.74,102.92 U13.4
D-
  Top 0.203: R5.1 27.24,46.77 27.24,46.06 29.39,43.9 30.29,43.9 31.28,42.91 31.28,42.13 U3.3
D-1
  Top 0.203: R13.1 88.2,46.77 88.2,46.06 90.35,43.9 91.25,43.9 92.24,42.91 92.24,42.13 U4.3
D-2
  Top 0.203: R21.1 88.2,107.73 88.2,107.02 90.35,104.86 91.25,104.86 92.24,103.87 92.24,103.09 U9.3
D-3
  Top 0.203: R29.1 27.24,107.73 27.24,107.02 29.39,104.86 30.29,104.86 31.28,103.87 31.28,103.09 U13.3
GND  (via drill 0.38)
  Top 0.203: U1.2 v32.17,48.12 30.65,49.65 30.65,50.19 C7.1 | U2.2 v34.87,25.67 | C3.1 35.14,43.36 35.14,43.08 U3.43 | U3.15 26.97,33.52 26.97,33.39 | U3.23 34.42,33.42 34.42,33.12 v33.97,32.67 | U3.5 29.65,42.37 v29.65,42.63 | U3.33 37.63,37.16 37.74,37.16 38.19,37.62 v38.19,37.97 | U3.35 37.37,39.77 v38.73,39.77
  Bottom 0.203: -.1 40.26,15.52 40.26,18.49
  other vias: 23.1,46.42 44.75,22.98 48.34,30.16 28.58,21.18 26.79,49.92 22.3,26.57 25.89,43.63 29.3,51 16.91,45.43 25.89,32.85 24.27,34.47 38.46,46.86 35.32,44.98 38.64,32.85 45.2,33.3 33.25,51.71 18.7,32.85 25.89,54.41 50.14,42.73
  pour Top (isolate 0.305): 53.73,53.51 arc90 17.81,53.51 arc90 17.81,17.59 arc90 53.73,17.59 arc90
  pour Bottom (isolate 0.305): 53.73,53.51 arc90 17.81,53.51 arc90 17.81,17.59 arc90 53.73,17.59 arc90
GND1  (via drill 0.38)
  Top 0.203: U6.2 v93.14,48.12 91.61,49.65 91.61,50.19 C15.1 | U7.2 v95.83,25.67 | C11.1 96.1,43.36 96.1,43.08 U4.43 | U4.15 87.93,33.52 87.93,33.39 | U4.23 95.38,33.42 95.38,33.12 v94.93,32.67 | U4.5 90.61,42.37 v90.61,42.63 | U4.33 98.59,37.16 98.7,37.16 99.15,37.62 v99.15,37.97 | U4.35 98.33,39.77 v99.69,39.77
  Bottom 0.203: -1.1 101.22,15.52 101.22,18.49
  other vias: 84.06,46.42 105.71,22.98 109.3,30.16 89.54,21.18 87.75,49.92 83.26,26.57 86.85,43.63 90.26,51 77.87,45.43 86.85,32.85 85.23,34.47 99.42,46.86 96.28,44.98 99.6,32.85 106.16,33.3 94.21,51.71 79.66,32.85 86.85,54.41 111.1,42.73
  pour Top (isolate 0.305): 114.69,53.51 arc90 78.77,53.51 arc90 78.77,17.59 arc90 114.69,17.59 arc90
  pour Bottom (isolate 0.305): 114.69,53.51 arc90 78.77,53.51 arc90 78.77,17.59 arc90 114.69,17.59 arc90
GND2  (via drill 0.38)
  Top 0.203: U10.2 v93.14,109.08 91.61,110.61 91.61,111.15 C23.1 | U11.2 v95.83,86.63 | C19.1 96.1,104.32 96.1,104.04 U9.43 | U9.15 87.93,94.48 87.93,94.35 | U9.23 95.38,94.38 95.38,94.08 v94.93,93.64 | U9.5 90.61,103.33 v90.61,103.59 | U9.33 98.59,98.12 98.7,98.12 99.15,98.58 v99.15,98.93 | U9.35 98.33,100.73 v99.69,100.73
  Bottom 0.203: -2.1 101.22,76.48 101.22,79.45
  other vias: 84.06,107.38 105.71,83.94 109.3,91.12 89.54,82.14 87.75,110.88 83.26,87.53 86.85,104.59 90.26,111.96 77.87,106.39 86.85,93.81 85.23,95.43 99.42,107.82 96.28,105.94 99.6,93.81 106.16,94.26 94.21,112.67 79.66,93.81 86.85,115.37 111.1,103.69
  pour Top (isolate 0.305): 114.69,114.47 arc90 78.77,114.47 arc90 78.77,78.55 arc90 114.69,78.55 arc90
  pour Bottom (isolate 0.305): 114.69,114.47 arc90 78.77,114.47 arc90 78.77,78.55 arc90 114.69,78.55 arc90
GND3  (via drill 0.38)
  Top 0.203: U14.2 v32.17,109.08 30.65,110.61 30.65,111.15 C31.1 | U15.2 v34.87,86.63 | C27.1 35.14,104.32 35.14,104.04 U13.43 | U13.15 26.97,94.48 26.97,94.35 | U13.23 34.42,94.38 34.42,94.08 v33.97,93.64 | U13.5 29.65,103.33 v29.65,103.59 | U13.33 37.63,98.12 37.74,98.12 38.19,98.58 v38.19,98.93 | U13.35 37.37,100.73 v38.73,100.73
  Bottom 0.203: -3.1 40.26,76.48 40.26,79.45
  other vias: 23.1,107.38 44.75,83.94 48.34,91.12 28.58,82.14 26.79,110.88 22.3,87.53 25.89,104.59 29.3,111.96 16.91,106.39 25.89,93.81 24.27,95.43 38.46,107.82 35.32,105.94 38.64,93.81 45.2,94.26 33.25,112.67 18.7,93.81 25.89,115.37 50.14,103.69
  pour Top (isolate 0.305): 53.73,114.47 arc90 17.81,114.47 arc90 17.81,78.55 arc90 53.73,78.55 arc90
  pour Bottom (isolate 0.305): 53.73,114.47 arc90 17.81,114.47 arc90 17.81,78.55 arc90 53.73,78.55 arc90
MISO  (via drill 0.38)
  Top 0.203: v25.71,36.09 25.71,36.27 27.59,38.15 27.59,38.33 28.49,39.23 28.61,39.23 U3.11
  Bottom 0.203: 24.45,36.09 21.31,39.23 v21.31,41.03 | 24.45,36.09 | 24.45,36.09 v25.71,36.09
MISO1  (via drill 0.38)
  Top 0.203: v86.67,36.09 86.67,36.27 88.56,38.15 88.56,38.33 89.45,39.23 89.57,39.23 U4.11
  Bottom 0.203: 85.41,36.09 82.27,39.23 v82.27,41.03 | 85.41,36.09 | 85.41,36.09 v86.67,36.09
MISO2  (via drill 0.38)
  Top 0.203: v86.67,97.05 86.67,97.23 88.56,99.11 88.56,99.29 89.45,100.19 89.57,100.19 U9.11
  Bottom 0.203: 85.41,97.05 82.27,100.19 v82.27,101.99 | 85.41,97.05 | 85.41,97.05 v86.67,97.05
MISO3  (via drill 0.38)
  Top 0.203: v25.71,97.05 25.71,97.23 27.59,99.11 27.59,99.29 28.49,100.19 28.61,100.19 U13.11
  Bottom 0.203: 24.45,97.05 21.31,100.19 v21.31,101.99 | 24.45,97.05 | 24.45,97.05 v25.71,97.05
MOSI  (via drill 0.38)
  Top 0.203: U3.10 28.78,39.77 28.31,39.77 27.24,38.69 26.88,38.69 v26.34,39.23
  Bottom 0.203: v21.31,44.62 21.4,43.09 25.26,39.23 v26.34,39.23
MOSI1  (via drill 0.38)
  Top 0.203: U4.10 89.74,39.77 89.27,39.77 88.2,38.69 87.84,38.69 v87.3,39.23
  Bottom 0.203: v82.27,44.62 82.36,43.09 86.22,39.23 v87.3,39.23
MOSI2  (via drill 0.38)
  Top 0.203: U9.10 89.74,100.73 89.27,100.73 88.2,99.65 87.84,99.65 v87.3,100.19
  Bottom 0.203: v82.27,105.58 82.36,104.05 86.22,100.19 v87.3,100.19
MOSI3  (via drill 0.38)
  Top 0.203: U13.10 28.78,100.73 28.31,100.73 27.24,99.65 26.88,99.65 v26.34,100.19
  Bottom 0.203: v21.31,105.58 21.4,104.05 25.26,100.19 v26.34,100.19
N$1
  Top 0.203: LED2.C 24.35,41.54 R6.1
N$2
  Top 0.203: U2.3 35.86,28.01 36.04,28.18 38.1,28.18 41.16,31.24 41.16,34.65 43.67,37.16 43.67,38.42 42.05,40.04 42.05,41.84 S1.2
N$3
  Top 0.203: R1.1 LED1.A
N$4
  Top 0.203: U1.1 34.64,47.49 36.38,47.49 LED1.C
N$5
  Top 0.203: Y1.1 30.2,31.88 30.2,33.21 29.48,33.93 29.48,34.65 | U3.17 29.48,34.65 | 29.48,34.65
N$6
  Top 0.203: R2.2 arc90 30.94,45.55 U1.5
N$7
  Top 0.203: Y1.3 28.58,33.65 28.58,34.46 U3.16
N$8
  Top 0.203: U2.4 32.42,26.28
  Top 0.254: 32.42,26.28 C1.1
N$9  (via drill 0.38)
  Top 0.203: U3.12 28.25,36.9 v27.77,36.9
  Bottom 0.203: v27.77,36.9 28.25,36.9 33.07,41.72 33.07,49.02 30.12,51.97 D11.1
N$10  (via drill 0.38)
  Top 0.203: v42.05,38.24 40.71,39.59 40.71,42.28 39.36,43.63 v39.36,44.53 | U3.30 38.05,34.65 v38.46,34.65
  Bottom 0.203: v38.46,34.65 v42.05,38.24 | v39.36,44.53 39.36,51.71 41.42,53.77 D10.1
N$11  (via drill 0.38)
  Top 0.203: U3.29 37.56,34.46 v37.56,33.75
  Bottom 0.203: v37.56,33.75 37.56,35.73 42.05,40.22 42.05,41.84 D9.1
N$12  (via drill 0.38)
  Top 0.203: v34.06,30.07 34.51,29.62 35.23,29.62 35.77,30.16 37.56,30.16 39.72,32.32 v39.72,33.93 | v50.13,39.14 51.93,37.34 51.93,31.96 53.99,29.9 D5.1 | U3.19 30.83,34.61 30.83,34.2 32,33.03 v32,32.5
  Bottom 0.203: v39.72,33.93 44.93,39.14 v50.13,39.14 | v32,32.5 34.06,30.43 v34.06,30.07
N$13  (via drill 0.38)
  Top 0.203: v33.16,29.17 33.61,28.72 37.92,28.72 40.08,30.88 v40.08,31.42 | U3.18 30.29,34.75 30.29,33.84 31.01,33.12 v31.01,31.51
  Bottom 0.203: D6.1 53.99,41.2 50.13,37.34 46.54,37.34 41.16,31.96 40.62,31.96 v40.08,31.42 | v31.01,31.51 33.16,29.35 v33.16,29.17
N$14  (via drill 0.38)
  Top 0.203: v29.21,26.48 31.28,24.41 31.28,14.89 30.75,14.37 A5.1 | U3.41 37.02,43.58 v37.02,45.07
  Bottom 0.203: v29.21,26.48 29.93,27.2 30.29,27.2 31.28,26.21 31.64,26.21 35.32,29.89 35.32,30.25 34.87,30.7 34.87,42.91 v37.02,45.07
N$15  (via drill 0.38)
  Top 0.203: U3.40 36.05,41.92 36.86,42.73 v37.56,42.73
  Bottom 0.203: A4.1 25.53,25.31 29.3,25.31 30.2,24.41 30.74,24.41 36.22,29.89 36.22,30.07 35.5,30.79 35.5,31.51 35.59,39.68 35.59,39.69 35.59,41.47 36.86,42.73 v37.56,42.73
N$16  (via drill 0.38)
  Top 0.203: v26.25,24.23 26.25,25.31 20.5,31.06 15.74,31.06 A3.1 | U3.39 36.66,41.84 v38.46,41.84
  Bottom 0.203: v26.25,24.23 29.12,24.23 29.66,23.7 30.74,23.7 36.93,29.89 36.93,30.07 36.13,30.88 36.13,39.5 v38.46,41.84
N$17  (via drill 0.38)
  Top 0.203: U3.38 36.47,40.94 v39.36,40.94 | v28.58,22.98 27.41,24.14 27.41,25.04 21.31,31.15 21.31,31.87 18.7,34.47 18.7,38.24 15.75,41.2 A2.1 14.58,41.11
  Bottom 0.203: v28.58,22.98 30.92,22.98 37.65,29.71 37.65,30.07 36.66,31.06 36.66,39.32 38.28,40.94 v39.36,40.94
N$18
  Top 0.203: R8.1 41.47,36.99 LED4.A
N$19
  Top 0.203: R5.2 24.99,49.02 23.22,49.02 U5.D-1
N$20
  Top 0.203: R4.2 23.73,48.12 23.2,48.12 U5.D+1
N$21
  Top 0.203: LED3.C 22.55,39.74 R7.1
N$22
  Top 0.203: U7.3 96.82,28.01 97,28.18 99.06,28.18 102.11,31.24 102.11,34.65 104.63,37.16 104.63,38.42 103.01,40.04 103.01,41.84 S3.2
N$23
  Top 0.203: R9.1 LED5.A
N$24
  Top 0.203: U6.1 95.6,47.49 97.34,47.49 LED5.C
N$25
  Top 0.203: R10.2 arc90 91.9,45.55 U6.5
N$26
  Top 0.203: U7.4 93.38,26.28
  Top 0.254: 93.38,26.28 C9.1
N$27  (via drill 0.38)
  Top 0.203: U4.12 89.21,36.9 v88.73,36.9
  Bottom 0.203: v88.73,36.9 89.21,36.9 94.03,41.72 94.03,49.02 91.08,51.97 D8.1
N$28  (via drill 0.38)
  Top 0.203: v103.01,38.24 101.67,39.59 101.67,42.28 100.32,43.63 v100.32,44.53 | U4.30 99.01,34.65 v99.42,34.65
  Bottom 0.203: v99.42,34.65 v103.01,38.24 | v100.32,44.53 100.32,51.71 102.38,53.77 D7.1
N$29  (via drill 0.38)
  Top 0.203: U4.29 98.52,34.46 v98.52,33.75
  Bottom 0.203: v98.52,33.75 98.52,35.73 103.01,40.22 103.01,41.84 D3.1
N$30  (via drill 0.38)
  Top 0.203: v90.17,26.48 92.24,24.41 92.24,14.89 91.71,14.37 A7.1 | U4.41 97.98,43.58 v97.98,45.07
  Bottom 0.203: v90.17,26.48 90.89,27.2 91.25,27.2 92.24,26.21 92.6,26.21 96.28,29.89 96.28,30.25 95.83,30.7 95.83,42.91 v97.98,45.07
N$31  (via drill 0.38)
  Top 0.203: U4.40 97.01,41.92 97.82,42.73 v98.52,42.73
  Bottom 0.203: A8.1 86.49,25.31 90.26,25.31 91.16,24.41 91.7,24.41 97.18,29.89 97.18,30.07 96.46,30.79 96.46,31.51 96.55,39.68 96.55,39.69 96.55,41.47 97.82,42.73 v98.52,42.73
N$32  (via drill 0.38)
  Top 0.203: v87.21,24.23 87.21,25.31 81.46,31.06 76.7,31.06 A6.1 | U4.39 97.62,41.84 v99.42,41.84
  Bottom 0.203: v87.21,24.23 90.08,24.23 90.62,23.7 91.7,23.7 97.89,29.89 97.89,30.07 97.09,30.88 97.09,39.5 v99.42,41.84
N$33  (via drill 0.38)
  Top 0.203: U4.38 97.43,40.94 v100.32,40.94 | v89.54,22.98 88.38,24.14 88.38,25.04 82.27,31.15 82.27,31.87 79.66,34.47 79.66,38.24 76.71,41.2 A1.1 75.54,41.11
  Bottom 0.203: v89.54,22.98 91.88,22.98 98.61,29.71 98.61,30.07 97.62,31.06 97.62,39.32 99.24,40.94 v100.32,40.94
N$34
  Top 0.203: R13.2 85.95,49.02 84.18,49.02 U8.D-1
N$35
  Top 0.203: R12.2 84.69,48.12 84.16,48.12 U8.D+1
N$36
  Top 0.203: LED6.C 85.31,41.54 R14.1
N$37
  Top 0.203: LED7.C 83.52,39.74 R15.1
N$38
  Top 0.203: Y2.1 91.16,31.88 91.16,33.21 90.44,33.93 90.44,34.65 | U4.17 90.44,34.65 | 90.44,34.65
N$39
  Top 0.203: Y2.3 89.54,33.65 89.54,34.46 U4.16
N$40  (via drill 0.38)
  Top 0.203: v95.02,30.07 95.47,29.62 96.19,29.62 96.73,30.16 98.52,30.16 100.68,32.32 v100.68,33.93 | v111.09,39.14 112.89,37.34 112.89,31.96 114.95,29.9 D2.1 | U4.19 91.79,34.61 91.79,34.2 92.95,33.03 v92.95,32.5
  Bottom 0.203: v100.68,33.93 105.89,39.14 v111.09,39.14 | v92.95,32.5 95.02,30.43 v95.02,30.07
N$41  (via drill 0.38)
  Top 0.203: v94.12,29.17 94.57,28.72 98.88,28.72 101.04,30.88 v101.04,31.42 | U4.18 91.25,34.75 91.25,33.84 91.97,33.12 v91.97,31.51
  Bottom 0.203: D4.1 114.95,41.2 111.09,37.34 107.5,37.34 102.11,31.96 101.58,31.96 v101.04,31.42 | v91.97,31.51 94.12,29.35 v94.12,29.17
N$42
  Top 0.203: R16.1 102.43,36.99 LED8.A
N$43
  Top 0.203: U11.3 96.82,88.97 97,89.14 99.06,89.14 102.11,92.2 102.11,95.61 104.63,98.12 104.63,99.38 103.01,101 103.01,102.8 S5.2
N$44
  Top 0.203: R17.1 LED9.A
N$45
  Top 0.203: U10.1 95.6,108.45 97.34,108.45 LED9.C
N$46
  Top 0.203: R18.2 arc90 91.9,106.5 U10.5
N$47
  Top 0.203: U11.4 93.38,87.24
  Top 0.254: 93.38,87.24 C17.1
N$48  (via drill 0.38)
  Top 0.203: U9.12 89.21,97.86 v88.73,97.86
  Bottom 0.203: v88.73,97.86 89.21,97.86 94.03,102.68 94.03,109.98 91.08,112.93 D17.1
N$49  (via drill 0.38)
  Top 0.203: v103.01,99.2 101.67,100.55 101.67,103.24 100.32,104.59 v100.32,105.49 | U9.30 99.01,95.61 v99.42,95.61
  Bottom 0.203: v99.42,95.61 v103.01,99.2 | v100.32,105.49 100.32,112.67 102.38,114.73 D16.1
N$50  (via drill 0.38)
  Top 0.203: U9.29 98.52,95.42 v98.52,94.71
  Bottom 0.203: v98.52,94.71 98.52,96.69 103.01,101.18 103.01,102.8 D14.1
N$51  (via drill 0.38)
  Top 0.203: v90.17,87.44 92.24,85.37 92.24,75.85 91.71,75.33 A11.1 | U9.41 97.98,104.54 v97.98,106.03
  Bottom 0.203: v90.17,87.44 90.89,88.16 91.25,88.16 92.24,87.17 92.6,87.17 96.28,90.85 96.28,91.21 95.83,91.66 95.83,103.87 v97.98,106.03
N$52  (via drill 0.38)
  Top 0.203: U9.40 97.01,102.89 97.82,103.69 v98.52,103.69
  Bottom 0.203: A12.1 86.49,86.27 90.26,86.27 91.16,85.37 91.7,85.37 97.18,90.85 97.18,91.03 96.46,91.75 96.46,92.47 96.55,100.64 96.55,100.65 96.55,102.43 97.82,103.69 v98.52,103.69
N$53  (via drill 0.38)
  Top 0.203: v87.21,85.19 87.21,86.27 81.46,92.02 76.7,92.02 A10.1 | U9.39 97.62,102.8 v99.42,102.8
  Bottom 0.203: v87.21,85.19 90.08,85.19 90.62,84.66 91.7,84.66 97.89,90.85 97.89,91.03 97.09,91.84 97.09,100.46 v99.42,102.8
N$54  (via drill 0.38)
  Top 0.203: U9.38 97.43,101.9 v100.32,101.9 | v89.54,83.94 88.38,85.1 88.38,86 82.27,92.11 82.27,92.83 79.66,95.43 79.66,99.2 76.71,102.16 A9.1 75.54,102.07
  Bottom 0.203: v89.54,83.94 91.88,83.94 98.61,90.67 98.61,91.03 97.62,92.02 97.62,100.28 99.24,101.9 v100.32,101.9
N$55
  Top 0.203: R21.2 85.95,109.98 84.18,109.98 U12.D-1
N$56
  Top 0.203: R20.2 84.69,109.08 84.16,109.08 U12.D+1
N$57
  Top 0.203: LED10.C 85.31,102.5 R22.1
N$58
  Top 0.203: LED11.C 83.52,100.7 R23.1
N$59
  Top 0.203: Y3.1 91.16,92.84 91.16,94.17 90.44,94.89 90.44,95.61 | U9.17 90.44,95.61 | 90.44,95.61
N$60
  Top 0.203: Y3.3 89.54,94.61 89.54,95.42 U9.16
N$61  (via drill 0.38)
  Top 0.203: v95.02,91.03 95.47,90.58 96.19,90.58 96.73,91.12 98.52,91.12 100.68,93.28 v100.68,94.89 | v111.09,100.1 112.89,98.31 112.89,92.92 114.95,90.86 D13.1 | U9.19 91.79,95.57 91.79,95.16 92.95,94 v92.95,93.46
  Bottom 0.203: v100.68,94.89 105.89,100.1 v111.09,100.1 | v92.95,93.46 95.02,91.39 v95.02,91.03
N$62  (via drill 0.38)
  Top 0.203: v94.12,90.13 94.57,89.68 98.88,89.68 101.04,91.84 v101.04,92.38 | U9.18 91.25,95.71 91.25,94.8 91.97,94.08 v91.97,92.47
  Bottom 0.203: D15.1 114.95,102.16 111.09,98.31 107.5,98.31 102.11,92.92 101.58,92.92 v101.04,92.38 | v91.97,92.47 94.12,90.31 v94.12,90.13
N$63
  Top 0.203: R24.1 102.43,97.95 LED12.A
N$64
  Top 0.203: U15.3 35.86,88.97 36.04,89.14 38.1,89.14 41.16,92.2 41.16,95.61 43.67,98.12 43.67,99.38 42.05,101 42.05,102.8 S7.2
N$65
  Top 0.203: R25.1 LED13.A
N$66
  Top 0.203: U14.1 34.64,108.45 36.38,108.45 LED13.C
N$67
  Top 0.203: R26.2 arc90 30.94,106.5 U14.5
N$68
  Top 0.203: U15.4 32.42,87.24
  Top 0.254: 32.42,87.24 C25.1
N$69  (via drill 0.38)
  Top 0.203: U13.12 28.25,97.86 v27.77,97.86
  Bottom 0.203: v27.77,97.86 28.25,97.86 33.07,102.68 33.07,109.98 30.12,112.93 D23.1
N$70  (via drill 0.38)
  Top 0.203: v42.05,99.2 40.71,100.55 40.71,103.24 39.36,104.59 v39.36,105.49 | U13.30 38.05,95.61 v38.46,95.61
  Bottom 0.203: v38.46,95.61 v42.05,99.2 | v39.36,105.49 39.36,112.67 41.42,114.73 D22.1
N$71  (via drill 0.38)
  Top 0.203: U13.29 37.56,95.42 v37.56,94.71
  Bottom 0.203: v37.56,94.71 37.56,96.69 42.05,101.18 42.05,102.8 D20.1
N$72  (via drill 0.38)
  Top 0.203: v29.21,87.44 31.28,85.37 31.28,75.85 30.75,75.33 A15.1 | U13.41 37.02,104.54 v37.02,106.03
  Bottom 0.203: v29.21,87.44 29.93,88.16 30.29,88.16 31.28,87.17 31.64,87.17 35.32,90.85 35.32,91.21 34.87,91.66 34.87,103.87 v37.02,106.03
N$73  (via drill 0.38)
  Top 0.203: U13.40 36.05,102.89 36.86,103.69 v37.56,103.69
  Bottom 0.203: A16.1 25.53,86.27 29.3,86.27 30.2,85.37 30.74,85.37 36.22,90.85 36.22,91.03 35.5,91.75 35.5,92.47 35.59,100.64 35.59,100.65 35.59,102.43 36.86,103.69 v37.56,103.69
N$74  (via drill 0.38)
  Top 0.203: v26.25,85.19 26.25,86.27 20.5,92.02 15.74,92.02 A14.1 | U13.39 36.66,102.8 v38.46,102.8
  Bottom 0.203: v26.25,85.19 29.12,85.19 29.66,84.66 30.74,84.66 36.93,90.85 36.93,91.03 36.13,91.84 36.13,100.46 v38.46,102.8
N$75  (via drill 0.38)
  Top 0.203: U13.38 36.47,101.9 v39.36,101.9 | v28.58,83.94 27.41,85.1 27.41,86 21.31,92.11 21.31,92.83 18.7,95.43 18.7,99.2 15.75,102.16 A13.1 14.58,102.07
  Bottom 0.203: v28.58,83.94 30.92,83.94 37.65,90.67 37.65,91.03 36.66,92.02 36.66,100.28 38.28,101.9 v39.36,101.9
N$76
  Top 0.203: R29.2 24.99,109.98 23.22,109.98 U16.D-1
N$77
  Top 0.203: R28.2 23.73,109.08 23.2,109.08 U16.D+1
N$78
  Top 0.203: LED14.C 24.35,102.5 R30.1
N$79
  Top 0.203: LED15.C 22.55,100.7 R31.1
N$80
  Top 0.203: Y4.1 30.2,92.84 30.2,94.17 29.48,94.89 29.48,95.61 | U13.17 29.48,95.61 | 29.48,95.61
N$81
  Top 0.203: Y4.3 28.58,94.61 28.58,95.42 U13.16
N$82  (via drill 0.38)
  Top 0.203: v34.06,91.03 34.51,90.58 35.23,90.58 35.77,91.12 37.56,91.12 39.72,93.28 v39.72,94.89 | v50.13,100.1 51.93,98.31 51.93,92.92 53.99,90.86 D19.1 | U13.19 30.83,95.57 30.83,95.16 32,94 v32,93.46
  Bottom 0.203: v39.72,94.89 44.93,100.1 v50.13,100.1 | v32,93.46 34.06,91.39 v34.06,91.03
N$83  (via drill 0.38)
  Top 0.203: v33.16,90.13 33.61,89.68 37.92,89.68 40.08,91.84 v40.08,92.38 | U13.18 30.29,95.71 30.29,94.8 31.01,94.08 v31.01,92.47
  Bottom 0.203: D21.1 53.99,102.16 50.13,98.31 46.54,98.31 41.16,92.92 40.62,92.92 v40.08,92.38 | v31.01,92.47 33.16,90.31 v33.16,90.13
N$84
  Top 0.203: R32.1 41.47,97.95 LED16.A
RESET  (via drill 0.38)
  Top 0.203: v26.61,35.19 27.19,35.19 27.25,35.19 U3.13 | v22.84,44.17 18.97,40.31 18.97,39.05 R3.2 20.11,37.86 19.6,37.34 19.6,35.55 v22.3,32.85 | S2.3 25.89,28.9 v25.89,29.26
  Bottom 0.203: v22.84,44.17 23.82,45.16 24.36,45.16 v24.9,44.62 | v26.61,35.19 24.27,32.85 v22.3,32.85 | v25.89,29.26 v22.3,32.85 | v22.3,32.85
RESET1  (via drill 0.38)
  Top 0.203: v87.57,35.19 88.15,35.19 88.21,35.19 U4.13 | v83.8,44.17 79.93,40.31 79.93,39.05 R11.2 81.07,37.86 80.56,37.34 80.56,35.55 v83.26,32.85 | S4.3 86.85,28.9 v86.85,29.26
  Bottom 0.203: v83.8,44.17 84.78,45.16 85.32,45.16 v85.86,44.62 | v87.57,35.19 85.23,32.85 v83.26,32.85 | v86.85,29.26 v83.26,32.85 | v83.26,32.85
RESET2  (via drill 0.38)
  Top 0.203: v87.57,96.15 88.15,96.15 88.21,96.15 U9.13 | v83.8,105.13 79.93,101.27 79.93,100.01 R19.2 81.07,98.82 80.56,98.31 80.56,96.51 v83.26,93.81 | S6.3 86.85,89.86 v86.85,90.22
  Bottom 0.203: v83.8,105.13 84.78,106.12 85.32,106.12 v85.86,105.58 | v87.57,96.15 85.23,93.81 v83.26,93.81 | v86.85,90.22 v83.26,93.81 | v83.26,93.81
RESET3  (via drill 0.38)
  Top 0.203: v26.61,96.15 27.19,96.15 27.25,96.15 U13.13 | v22.84,105.13 18.97,101.27 18.97,100.01 R27.2 20.11,98.82 19.6,98.31 19.6,96.51 v22.3,93.81 | S8.3 25.89,89.86 v25.89,90.22
  Bottom 0.203: v22.84,105.13 23.82,106.12 24.36,106.12 v24.9,105.58 | v26.61,96.15 24.27,93.81 v22.3,93.81 | v25.89,90.22 v22.3,93.81 | v22.3,93.81
RX_LED
  Top 0.203: U3.8 29.17,40.76 28.04,40.76 27.68,41.12 26.43,41.12 25.65,40.34 R6.2
RX_LED1
  Top 0.203: U4.8 90.13,40.76 89,40.76 88.64,41.12 87.39,41.12 86.61,40.34 R14.2
RX_LED2
  Top 0.203: U9.8 90.13,101.72 89,101.72 88.64,102.08 87.39,102.08 86.61,101.3 R22.2
RX_LED3
  Top 0.203: U13.8 29.17,101.72 28.04,101.72 27.68,102.08 26.43,102.08 25.65,101.3 R30.2
SCK  (via drill 0.38)
  Top 0.203: U3.9 29.01,40.22 v27.33,40.22
  Bottom 0.203: v23.11,42.82 25.35,40.58 25.71,40.22 v27.33,40.22
SCK1  (via drill 0.38)
  Top 0.203: U4.9 89.97,40.22 v88.29,40.22
  Bottom 0.203: v84.06,42.82 86.31,40.58 86.67,40.22 v88.29,40.22
SCK2  (via drill 0.38)
  Top 0.203: U9.9 89.97,101.18 v88.29,101.18
  Bottom 0.203: v84.06,103.78 86.31,101.54 86.67,101.18 v88.29,101.18
SCK3  (via drill 0.38)
  Top 0.203: U13.9 29.01,101.18 v27.33,101.18
  Bottom 0.203: v23.11,103.78 25.35,101.54 25.71,101.18 v27.33,101.18
TX_LED  (via drill 0.38)
  Top 0.203: v24.72,37.62 R7.2 | v29.48,29.26 30.38,30.16 30.92,30.16 32.98,32.23 32.98,32.77 32.09,33.66 32.09,33.78 U3.22
  Bottom 0.203: v24.72,37.62 25.26,37.08 26.16,37.08 27.5,35.73 27.5,31.24 v29.48,29.26
TX_LED1  (via drill 0.38)
  Top 0.203: v85.68,37.62 R15.2 | v90.44,29.26 91.34,30.16 91.88,30.16 93.94,32.23 93.94,32.77 93.05,33.66 93.05,33.78 U4.22
  Bottom 0.203: v85.68,37.62 86.22,37.08 87.12,37.08 88.47,35.73 88.47,31.24 v90.44,29.26
TX_LED2  (via drill 0.38)
  Top 0.203: v85.68,98.58 R23.2 | v90.44,90.22 91.34,91.12 91.88,91.12 93.94,93.19 93.94,93.72 93.05,94.62 93.05,94.74 U9.22
  Bottom 0.203: v85.68,98.58 86.22,98.04 87.12,98.04 88.47,96.69 88.47,92.2 v90.44,90.22
TX_LED3  (via drill 0.38)
  Top 0.203: v24.72,98.58 R31.2 | v29.48,90.22 30.38,91.12 30.92,91.12 32.98,93.19 32.98,93.72 32.09,94.62 32.09,94.74 U13.22
  Bottom 0.203: v24.72,98.58 25.26,98.04 26.16,98.04 27.5,96.69 27.5,92.2 v29.48,90.22
USER_LED
  Top 0.203: R8.2 38.43,36.36 37.73,36.36 U3.32
USER_LED1
  Top 0.203: R16.2 99.39,36.36 98.69,36.36 U4.32
USER_LED2
  Top 0.203: R24.2 99.39,97.32 98.69,97.32 U9.32
USER_LED3
  Top 0.203: R32.2 38.43,97.32 37.73,97.32 U13.32
V_BATT  (via drill 0.51)
  Top 0.203: U1.3 33.17,50.46 33.43,50.46 v35.32,48.57 | v37.11,46.77 38.46,48.12 39.36,48.12 44.39,43.09 44.39,42.37 42.95,40.94 42.95,40.22 44.75,38.42 44.75,37.34 42.05,34.65 42.05,34.47 C8.2 41.96,32.77 41.96,31.33 38.65,28.02 38.65,27.66 JP1.2 38.1,23.36 38.1,20.64 D1.A
  Bottom 0.203: v35.32,48.57 v37.11,46.77
V_BATT1  (via drill 0.51)
  Top 0.203: U6.3 94.13,50.46 94.39,50.46 v96.28,48.57 | v98.07,46.77 99.42,48.12 100.32,48.12 105.35,43.09 105.35,42.37 103.91,40.94 103.91,40.22 105.71,38.42 105.71,37.34 103.01,34.65 103.01,34.47 C16.2 102.92,32.77 102.92,31.33 99.61,28.02 99.61,27.66 JP4.2 99.06,23.36 99.06,20.64 D12.A
  Bottom 0.203: v96.28,48.57 v98.07,46.77
V_BATT2  (via drill 0.51)
  Top 0.203: U10.3 94.13,111.42 94.39,111.42 v96.28,109.53 | v98.07,107.73 99.42,109.08 100.32,109.08 105.35,104.05 105.35,103.33 103.91,101.9 103.91,101.18 105.71,99.38 105.71,98.31 103.01,95.61 103.01,95.43 C24.2 102.92,93.72 102.92,92.29 99.61,88.98 99.61,88.62 JP7.2 99.06,84.32 99.06,81.6 D18.A
  Bottom 0.203: v96.28,109.53 v98.07,107.73
V_BATT3  (via drill 0.51)
  Top 0.203: U14.3 33.17,111.42 33.43,111.42 v35.32,109.53 | v37.11,107.73 38.46,109.08 39.36,109.08 44.39,104.05 44.39,103.33 42.95,101.9 42.95,101.18 44.75,99.38 44.75,98.31 42.05,95.61 42.05,95.43 C32.2 41.96,93.72 41.96,92.29 38.65,88.98 38.65,88.62 JP10.2 38.1,84.32 38.1,81.6 D24.A
  Bottom 0.203: v35.32,109.53 v37.11,107.73

## Text on the board
Bottom: v12 | v12 | v12 | v12
Dimension: ROUTE / OUT | ROUTE / OUT | ROUTE / OUT | ROUTE / OUT | ROUTE / OUT | ROUTE / OUT | ROUTE / OUT | ROUTE / OUT | ROUTE / OUT | ROUTE / OUT | ROUTE / OUT | ROUTE / OUT | ROUTE / OUT | ROUTE / OUT | ROUTE / OUT | ROUTE / OUT
tPlace: 11 | 10 | 11 | 10 | CHG | 9 | CHG | 9 | CHG | CHG | ON | ON | A2 | 3 | A2 | 3 | RX | RX | TX | TX | STAT | STAT | RESET | RESET | A3 | 2 | A3 | 2 | A4 | + | A4 | + | A5 | A5 | - | - | 11 | 11 | 10 | 10 | CHG | 9 | CHG | 9 | CHG | CHG | ON | 3 | ON | 3 | A2 | A2 | RX | RX | TX | TX | STAT | STAT | RESET | RESET | A3 | 2 | A3 | 2 | A4 | + | A4 | + | A5 | A5 | - | -
Milling: V-SCORE | V-SCORE | V-SCORE | V-SCORE | V-SCORE | V-SCORE | V-SCORE | V-SCORE